# Altium PCB TSAL-P01-V00-TSALControl.PcbDoc
Units mil, origin at the board's own origin, x right, y up, seen from the top; angles counter-clockwise.
Board outline 2047.24 x 944.88 mil, 2 copper layers (Top Layer, Bottom Layer), stack 61.756 mil thick; 23 components, 17 nets, 73 pads, 3 vias.
Unrouted connection lines stored in the file: 22.
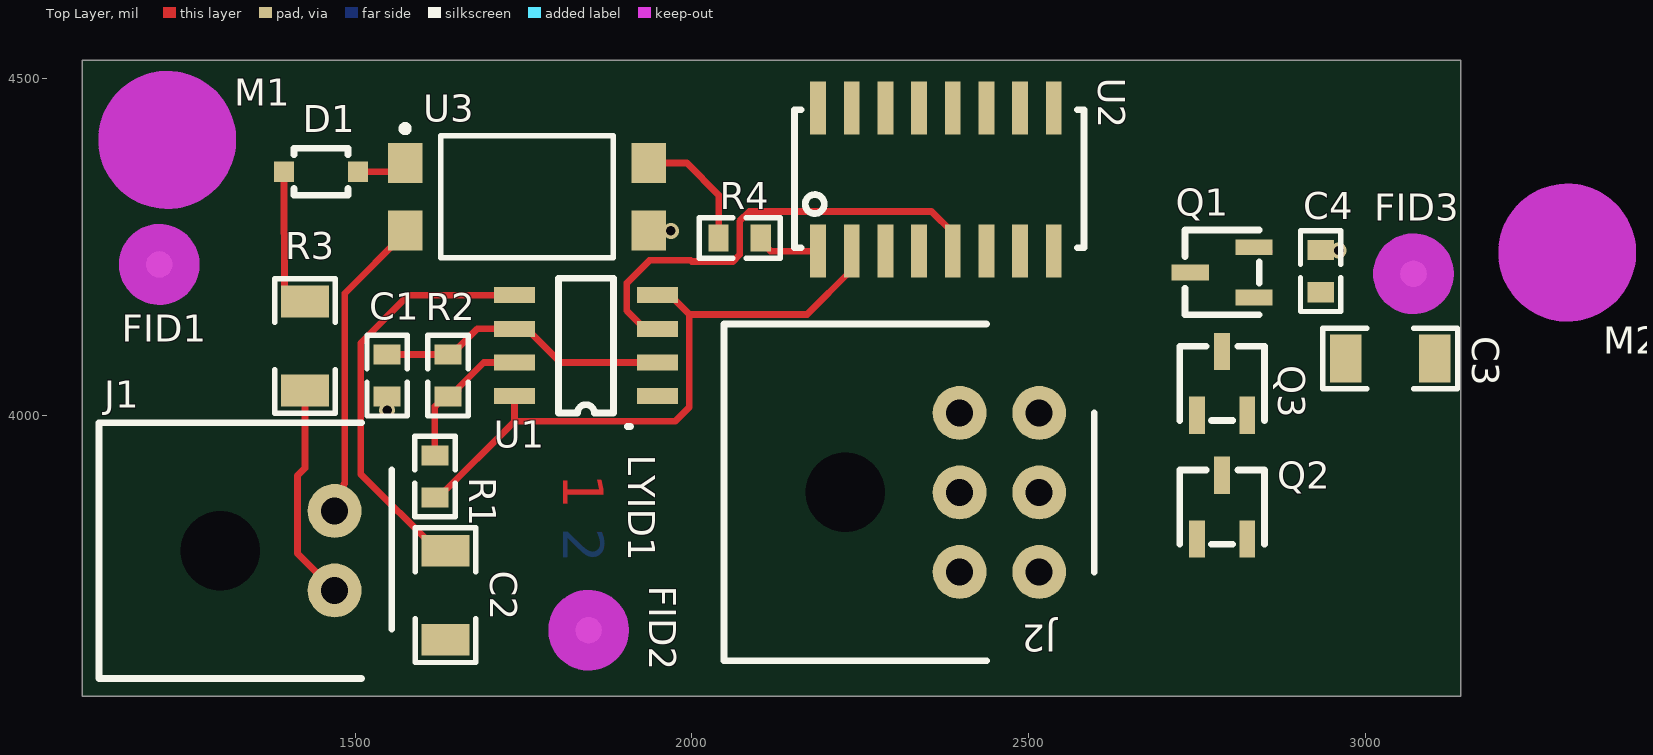
[diagram p0: Top Layer view]
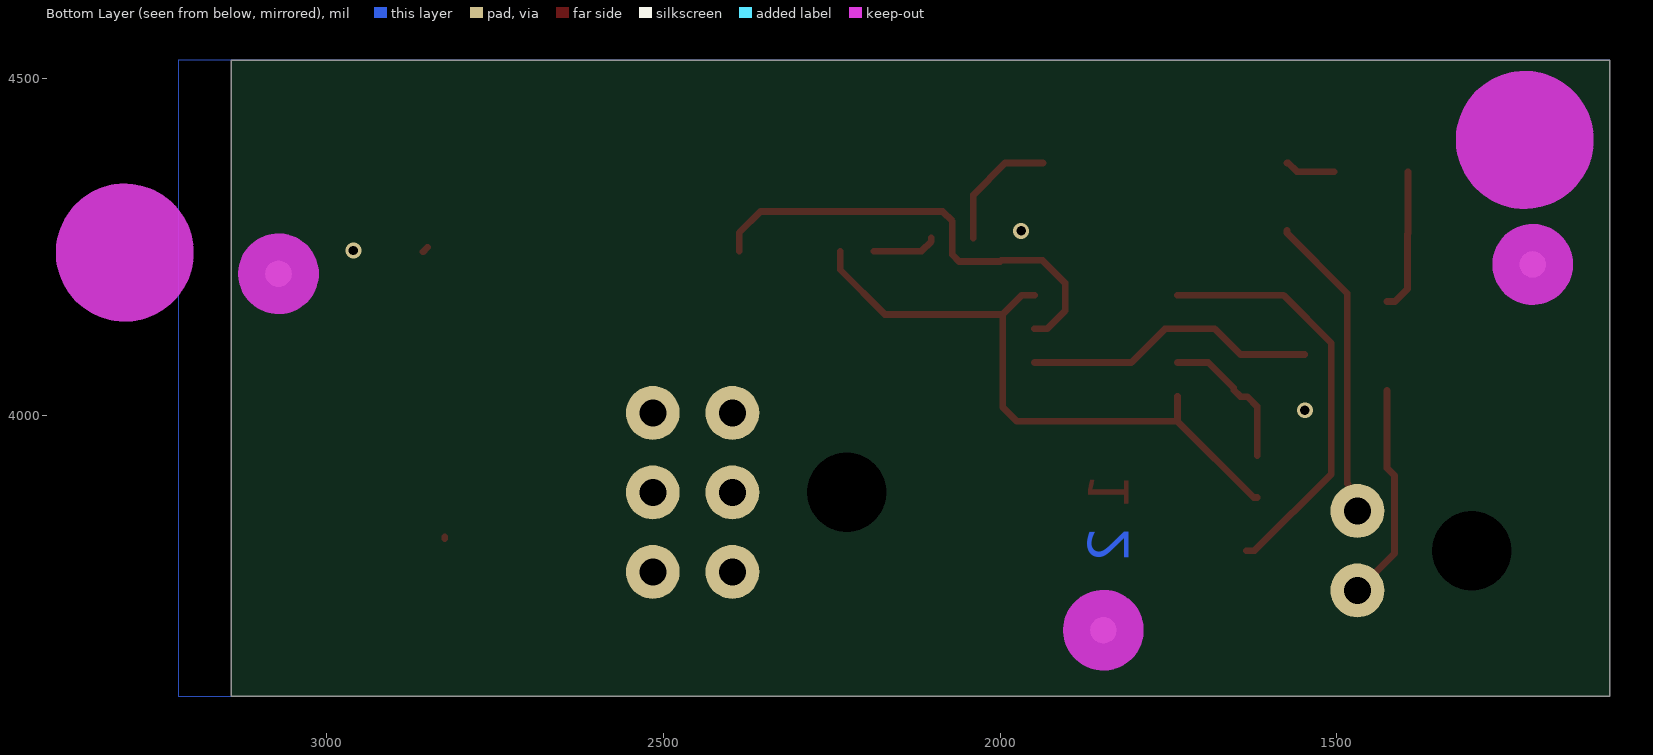
[diagram p1: Bottom Layer view, seen from below]
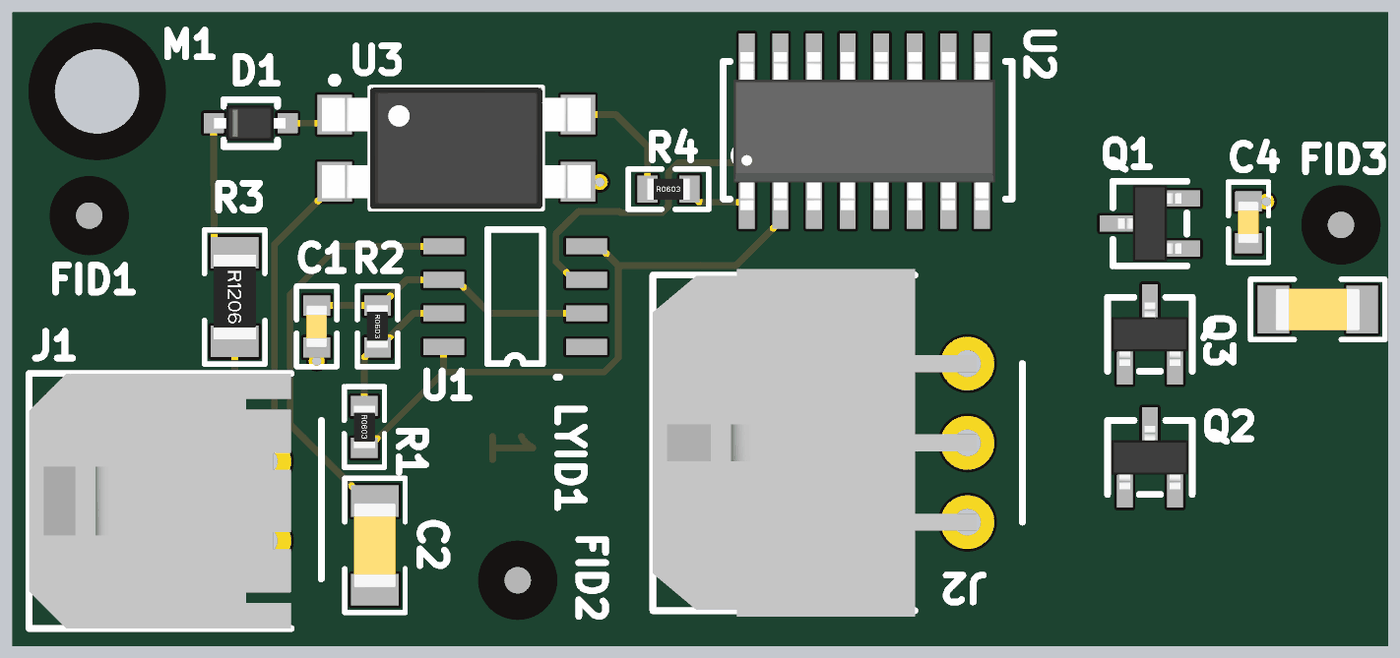
[diagram p2: 3D render of the assembled board from above, using the file's embedded part models]

## Layer stack, top to bottom
Top Solder: solder mask 1, SM-001, Dk 4
Top Layer: signal copper 1.378
Dielectric 1: core 59, Core-043, Dk 4.3
Bottom Layer: signal copper 1.378
Bottom Solder: solder mask 1, SM-001, Dk 4

## Board outline
1094.49,3582.68 1094.49,4527.56 3141.73,4527.56 3141.73,3582.68

## Design rules (kind name [scope] priority, off if disabled: settings)
Clearance [All] p1: gap=10 ignorepadtopadclearanceinfootprint=FALSE except(0: Arc-Hole Track-Hole SMDPad-Hole THPad-Hole Via-Hole Fill-Hole Poly-Hole Region-Hole Text-Hole)
HoleSize [All] p1: absolutevalues=TRUE maxlimit=141.73 minlimit=1 maxpercent=80.000 minpercent=20.000
PolygonConnect [All] p1: connectstyle=Relief reliefconductorwidth=10 reliefentries=4 polygonreliefangle="90 Angle" airgapwidth=10
RoutingVias [All] p1: holewidth=28 width=50 viastyle="Through Hole" minholewidth=28 minwidth=50 maxholewidth=28 maxwidth=50
SilkToSilkClearance [All] p1: silktosilkclearance=0
SilkToSolderMaskClearance [IsPad] p1: minsilkscreentomaskgap=0 clearancetoexposedcopper=FALSE
SolderMaskExpansion [All] p1: expansion=4 istentingtop=FALSE
Width [All] p1: maxlimit=10 minlimit=10 preferedwidth=10
27 further rules are at their usual default settings.

## Components (designator, comment, footprint, x,y, rotation, side; value= is the part's Value field where it differs from the comment)
C1 "4u7 50V" Cap_Ceramic_0603 1547.24,4059.32 r90 top
C2 "10nF 25V 5% X7R 0402" Cap_Ceramic_1206 1633.86,3733.13 r90 top
C3 "22uF 35V" Cap_Ceramic_1206 3037.22,4084.57 r180 top
C4 "100nF 50V" Cap_Ceramic_0603 2934.02,4214.49 r270 top
D1 "MM3Z56VB" SOD-323F 1338.94,4357.2 r180 top
FID1 "Fiducial 1MM" "FIDUCIAL 1MM" 1208.66,4224.41 r270 top
FID2 "Fiducial 1MM" "FIDUCIAL 1MM" 1846.46,3681.1 r90 top
FID3 "Fiducial 1MM" "FIDUCIAL 1MM" 3071.81,4210.55 r90 top
J1 "Microfit 3.0 1x2" Microfit_1X2_R_TH 1299.21,3799.21 r270 top
J2 "Microfit 3.0 2x3" Microfit_2X3_R_TH 2227.64,3885.83 r270 top
LYID1 "2 Layer Identification PCB Marker" "LAYER IDENT 2" 1838.58,3858.27 r270 top
M1 "Hole M3 Tight Unplated" "M3.2 UNPLATED" 1220.47,4409.45 r0 top
M2 "Hole M3 Tight Unplated" "M3.2 UNPLATED" 3300.16,4242.05 r0 top
Q1 "CPH3351" SOT-23-3 2787.4,4212.6 r180 top
Q2 "CPH3351" SOT-23-3 2787.4,3864.09 r90 top
Q3 "CPH3351" SOT-23-3 2787.4,4047.6 r90 top
R1 "1k" Res_ThinFilm_0603 1618.11,3909.45 r270 top
R2 "51k" Res_ThinFilm_0603 1637.8,4059.32 r270 top
R3 "220R 5% 1206" Res_ThinFilm_1206 1425.2,4103.21 r270 top
R4 "1k 5% 0603" Res_ThinFilm_0603 2070.87,4263.78 r0 top
U1 "LM555CMX" "MCP2561 SOIC" 1948.82,4028.74 r180 top
U2 "CD4049UB" CD4049UB 2537.4,4244.09 r90 top
U3 "FOD817ASD" FOD817ASD 1755,4325 r0 top

## Footprints (in the part's own frame and the unit in brackets; to place one, negate y for a bottom-side part, rotate by r counter-clockwise, add the part's x,y. Pads: shape width x height; smd on the part's side, far side on the other; paste and mask are expansions set on the pad)
Cap_Ceramic_0603 [mil]
  rect 30x40 smd: 1(-31.24,0) 2(31.24,0)
  silkscreen extent -60,-30 60,30, body extent -31,-16 32,16, height 33
Cap_Ceramic_1206 [mil]
  rect 47x71 smd: 1(-66.08,0) 2(66.08,0)
  silkscreen extent -100,-45 100,45, body extent -63,-31 63,32, height 53
CD4049UB [mm]
  rect 2x0.6 smd: 1(0,8.89) 2(0,7.62) 3(0,6.35) 4(0,5.08) 5(0,3.81) 6(0,2.54) 7(0,1.27) 8(0,0) 9(5.4,0) 10(5.4,1.27) 11(5.4,2.54) 12(5.4,3.81) 13(5.4,5.08) 14(5.4,6.35) 15(5.4,7.62) 16(5.4,8.89)
  silkscreen extent 0.13,-1.14 5.33,9.78, body extent -0.29,-0.51 5.69,9.39, height 1.35
"FIDUCIAL 1MM" [mm]
  round 1 smd mask+1: 1(0,0)
  round 1 smd far side mask+1: 1(0,0)
  Keep-Out Layer circle w1.524: c0,0 r0.762
FOD817ASD [mm]
  rect 1.3x1.5 smd: 1(-4.6,1.27) 2(-4.6,-1.27) 3(4.6,-1.27) 4(4.6,1.27)
  silkscreen extent -4.72,-2.3 3.25,2.69, body extent -5.08,-2.3 5.08,2.3, height 3.85
"LAYER IDENT 2" [mil]
  Top Layer pour cut-out: -20,-5
  Top Layer pour cut-out: -10,30
  Top Layer pour cut-out: -90,50 -90,-50 90,-50 90,50
  Top Layer pour cut-out: 190,150
  Bottom Layer pour cut-out: -90,50 -90,-50 90,-50 90,50
"M3.2 UNPLATED" [mm]
  round 0 hole 3.2 unplated mask+2.6: 1(0,0)
  Keep-Out Layer circle w2.667: c0,0 r1.27
"MCP2561 SOIC" [mm]
  rect 1.55x0.6 smd: 1(0,0) 2(0,-1.27) 3(0,-2.54) 4(0,-3.81) 5(5.4,-3.81) 6(5.4,-2.54) 7(5.4,-1.27) 8(5.4,0)
  silkscreen extent 1.02,-4.44 3.74,1.14, body extent 0.51,-4.38 4.64,0.52, height 1.65
Microfit_1X2_R_TH [mil]
  round 80 hole 40: 1(59.06,170) 2(-59.06,170)
  round 0 hole 118.11 mask+10: NC(0,0)
  silkscreen extent -190,-180 190,255, body extent -190,-180 190,210, height 223
Microfit_2X3_R_TH [mil]
  round 80 hole 40: 1(118.11,170) 2(0,170) 3(-118.11,170) 4(118.11,288.19) 5(0,288.19) 6(-118.11,288.19)
  round 0 hole 118.11 mask+10: NC(0,0)
  silkscreen extent -250,-180 250,370, body extent -259,-180 259,302, height 350
Res_ThinFilm_0603 [mil]
  rect 30x40 smd: 1(-31.24,0) 2(31.24,0)
  silkscreen extent -60,-30 60,30, body extent -31,-16 32,16, height 18
Res_ThinFilm_1206 [mil]
  rect 47x71 smd: 1(-66.08,0) 2(66.08,0)
  silkscreen extent -100,-45 100,45, body extent -63,-31 63,32, height 24
SOD-323F [mil]
  rect 30x30 smd: 1(-165,-5) 2(-55,-5)
  silkscreen extent -150,-40 -70,30, body extent -162,-32 -56,22, height 33
SOT-23-3 [mm]
  rect 1.4x0.6 smd: D(1.2,0) G(-1.2,0.95) S(-1.2,-0.95)
  silkscreen extent -1.4,-1.6 1.4,1.6, body extent -1.2,-1.45 1.2,1.45, height 1

## Part data
C1: library part "4u7 50V 5% X7R 0603", "Capacitor, Ceramic, SMD, 4u7, 50V, 5%, X7R, 0603"
C2: "10000pF ±5% 25V Ceramic Capacitor X7R 0402 (1005 Metric)", ComponentLink1Description=Digikey, ComponentLink1URL=https://www.digikey.com/product-detail/en/murata-electronics/GRM155R71E103JA01J/490-6340-1-ND/3845537, ComponentLink2Description=Datasheet, ComponentLink2URL=https://search.murata.co.jp/Ceramy/image/img/A01X/G101/ENG/GRM155R71E103JA01-01.pdf
C3: library part "22uF 35V 20% X5R 1206", "22µF ±20% 35V Ceramic Capacitor X5R 1206 (3216 Metric)", ComponentLink1Description=Digikey, ComponentLink1URL=https://www.digikey.com.au/product-detail/en/tdk-corporation/C3216X5R1V226M160AC/445-8045-1-ND/2792165, ComponentLink2Description=Datasheet, ComponentLink2URL=https://product.tdk.com/info/en/catalog/datasheets/mlcc_commercial_general_en.pdf
C4: library part "100nF 50V 5% X7R 0603", "Capacitor, Ceramic, SMD, 100nF, 50V, 5%, X7R, 0603"
D1: "Zener Diode 56V 200mW ±2% Surface Mount SOD-323F", Manufacturer="ON Semiconductor", ComponentLink1Description=Digikey, ComponentLink1URL=https://www.digikey.com.au/product-detail/en/on-semiconductor/MM3Z56VB/MM3Z56VBCT-ND/1626897, ComponentLink2Description=Datasheet, ComponentLink2URL=https://www.onsemi.com/pub/Collateral/MM3Z9V1B-D.pdf, MPN=MM3Z56VB
J1: library part Microfit_1x2
J2: library part Microfit_2x3
LYID1: library part "Layer Identification 2"
M1 M2: "M3.2 Hole, No Plating"
Q1 Q2 Q3: "P-Channel 60V 1.8A (Ta) 1W (Ta) Surface Mount 3-CPH", ComponentLink1Description=Datasheet, ComponentLink1URL=https://www.onsemi.com/pub/Collateral/CPH3351-D.PDF, ComponentLink2Description=Digikey, ComponentLink2URL=https://www.digikey.com/products/en/discrete-semiconductor-products/transistors-fets-mosfets-single/278?k=&pkeyword=&sv=0&pv7=2&sf=0&FV=-1%7C488%2C-8%7C278&mpart=CPH3351-TL-W&quantity=&ColumnSort=0&page=1&stock=1&nstock=1&datasheet=1&photo=1&pageSize=25
R1: library part "1k 5% 0603", "Resistor, SMD, 1k, 0.1W, 5%, 0603"
R2: library part "51k 5% 0603", "51 kOhms ±0.1% 0.063W, 1/16W Chip Resistor 0402 (1005 Metric) Automotive AEC-Q200 Thin Film", ComponentLink1Description=Digikey, ComponentLink1URL=https://www.digikey.com.au/product-detail/en/panasonic-electronic-components/ERA-2AEB513X/P51KDCCT-ND/1706224, ComponentLink2Description=Datasheet1, ComponentLink2URL=https://industrial.panasonic.com/cdbs/www-data/pdf/RDM0000/AOA0000C307.pdf, ComponentLink3Description=Datasheet2, ComponentLink3URL=https://media.digikey.com/pdf/Data%20Sheets/Panasonic%20Resistors%20Thermistors%20PDFs/ERA_Series_LE.pdf, ComponentLink4Description=Datasheet3, ComponentLink4URL=https://industrial.panasonic.com/cdbs/www-data/pdf/RDM0000/DMM0000COL9.pdf
R3: "220 Ohms ±1% 0.25W, 1/4W Chip Resistor 1206 (3216 Metric) Moisture Resistant Thick Film", ComponentLink1Description=Digikey, ComponentLink1URL=https://www.digikey.com.au/product-detail/en/yageo/RC1206FR-07220RL/311-220FRCT-ND/731640, ComponentLink2Description=Datasheet, ComponentLink2URL=https://www.yageo.com/upload/media/product/productsearch/datasheet/rchip/PYu-RC_Group_51_RoHS_L_10.pdf
R4: "Resistor, SMD, 1k, 0.1W, 5%, 0603"
U1: "555 Type, Timer/Oscillator (Single) IC 100kHz 8-SOIC", ComponentLink1Description=Digikey, ComponentLink1URL=https://www.digikey.com.au/product-detail/en/texas-instruments/LM555CMX%2FNOPB/LM555CMX%2FNOPBCT-ND/1010545?utm_adgroup=Integrated%20Circuits&utm_source=google&utm_medium=cpc&utm_campaign=Dynamic%20Search_EN_Product&utm_term=&productid=&gclid=CjwKCAjwr7X4BRA4EiwAUXjbt-N3vibcCncJp7dB6lpBrLRT-QxYTJoHZmGPqFSswFIeP9Lhu7cYVBoCjmMQAvD_BwE, ComponentLink2Description=Datasheet, ComponentLink2URL=https://www.ti.com/general/docs/suppproductinfo.tsp?distId=10&gotoUrl=http%3A%2F%2Fwww.ti.com%2Flit%2Fgpn%2Flm555
U3: "Optoisolator 5kV Transistor 4SMD"

## Via types
v1: diameter 23.62, hole 13.78, Top Layer to Bottom Layer, 3 vias

## Nets (pads, with @x,y where several pads share a name; then routed paths per layer and width w, separated by ;. In a path a pad name is that pad's centre, name@x,y a point inside that pad or via, vN(x,y) a via of type N, cw(c..) or ccw(c..) an arc to the next point about the centre after c; other vN are vias at no path point)
12V: C3.2 C4.2 J2.1 Q1.D Q2.D Q3.D R4.2 U2.1 | length 96.4
  Top Layer w10: R4.2 2102.1,4258.78 2116.79,4244.09 U2.1
GND: C1.1 C2.1 C3.1 C4.1 J2.4 U1.1 U2.8 U2.9 U2.11 U2.14 U3.3
  other v1: 1547.24,4007.87 2960.66,4245.17 1968.64,4274.32
"HV IN": J1.1 R3.2 | length 324.3
  Top Layer w10: R3.2 1425.2,3921.86 1414.21,3910.87 1414.21,3795.16 J1.1
"HV ON": Q3.G R1.2 U1.4 U1.8 U2.2 U2.7 | length 964.2
  Top Layer w10: R1.2 1623.11,3878.21 1736.22,3991.32 ; U1.8 1736.22,3991.32 ; U1.4 1967.52,4178.74 1996.06,4150.2 ; U2.2 2237.4,4216.54 2171.06,4150.2 1996.06,4150.2 ; 1736.22,3991.32 1974.94,3991.32 1996.06,4012.45 1996.06,4150.2
"HV OUT": J1.2 U3.2 | length 460.1
  Top Layer w10: J1.2 1482.61,3871.66 1482.61,3897.48 1484.25,3899.13 1484.25,4181.42 1573.9,4271.06 U3.2
NetC2_2: C2.2 U1.5 | length 625.3
  Top Layer w10: C2.2 1621.86,3799.21 1507.87,3913.2 1507.87,4107.39 1579.22,4178.74 U1.5
NetD1_1: D1.1 U3.1 | length 75.3
  Top Layer w10: D1.1 1559.06,4362.2 1571.85,4375 U3.1
NetD1_2: D1.2 R3.1 | length 212.9
  Top Layer w10: D1.2 1393.94,4270.38 1394.7,4269.62 1394.7,4187.79 1413.2,4169.29 R3.1
NetJ2_2: J2.2 Q1.S | length 9.6
  Top Layer w10: Q1.S@2850.39,4250 Q1.S@2857.2,4243.19
NetJ2_3: J2.3 Q2.S | length 2.9
  Top Layer w10: Q2.S Q2.S@2824.8,3819.76
NetJ2_6: J2.6 Q3.S
NetQ1_G: Q1.G U2.4
NetQ2_G: Q2.G U2.6
NetR4_1: R4.1 U2.3 U3.4 | length 187.1
  Top Layer w10: U3.4 1992.46,4375 2039.63,4327.83 R4.1
NetU1_3: U1.3 U2.5 | length 697.3
  Top Layer w10: U1.3 1930.12,4128.74 1903.31,4155.55 1903.31,4196.76 1937.02,4230.47 1998.08,4230.47 1999.78,4228.78 2060.84,4228.78 2070.87,4238.8 2070.87,4288.76 2085.26,4303.15 2355.91,4303.15 2387.4,4271.65 U2.5
"RED LED SPLIT": R1.1 R2.2 U1.7 | length 219.5
  Top Layer w10: R1.1 1618.11,4013.39 1632.8,4028.08 R2.2 1642.8,4028.08 1652.8,4038.08 1652.8,4040.83 1690.71,4078.74 U1.7
THRESH-TRIG: C1.2 R2.1 U1.2 U1.6 | length 438.1
  Top Layer w10: C1.2 R2.1 1642.8,4090.55 1680.98,4128.74 U1.6 1754.92,4128.74 1804.92,4078.74 U1.2
pads on no net: FID1.1 FID2.1 FID3.1 J1.NC J2.5 J2.NC M1.1 M2.1 U2.10 U2.12 U2.13 U2.15 U2.16

## Polygon pours and split planes (outlines as drawn)
GND on Bottom Layer "NONET_L02_P000" (solid, remove dead copper, shelved, pour order 0): 1094.49,4527.56 3220.47,4527.56 3220.47,3582.68 1094.49,3582.68

## Silkscreen, mask and mechanical layers (free items; w line width, h text height)
Mechanical 1:
  the board outline again, w10

## Text inside footprints (layer, text, board x,y; h text height)
LYID1: Top Layer "1" at 1808.58,3913.27 h60 r270; Bottom Layer "2" at 1808.58,3833.27 h60 r270